# Altium PCB datalogger1.PcbDoc
Units mm, origin at the board's own origin, x right, y up, seen from the top; angles counter-clockwise.
Board outline 101.6 x 53.34 mm, 2 copper layers (Top Layer, Bottom Layer); 36 components, 62 nets, 209 pads, 15 vias.
Unrouted connection lines stored in the file: 7.
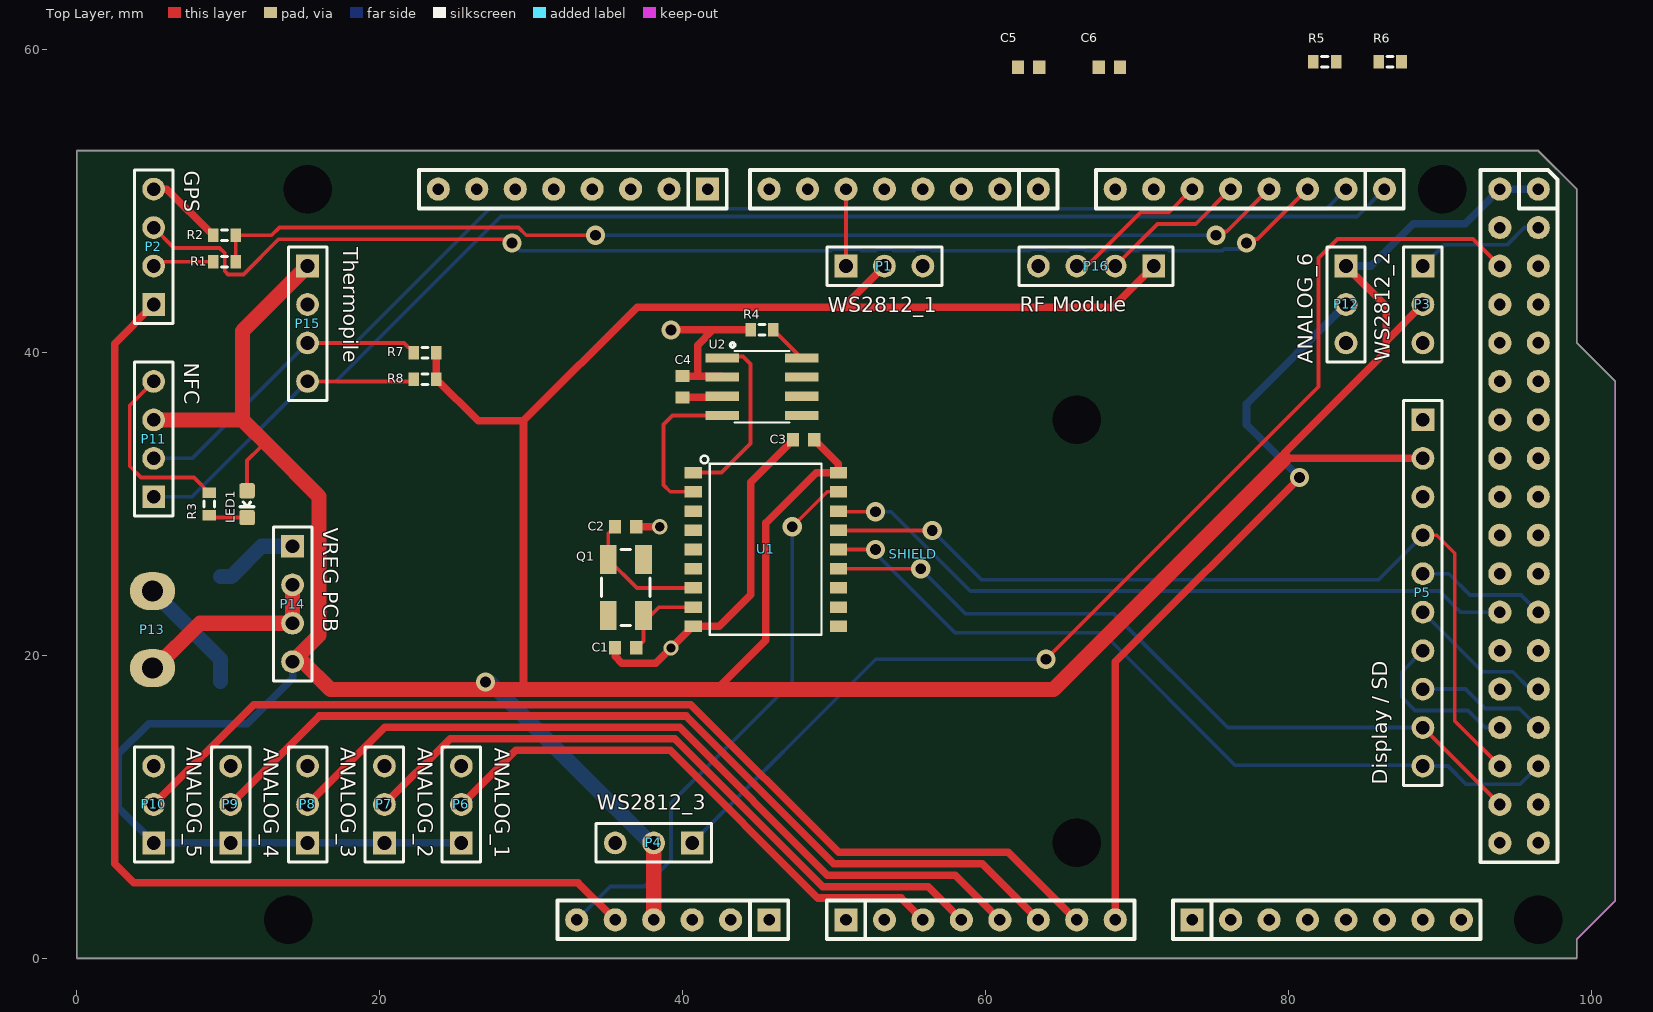
[diagram p0: Top Layer view]
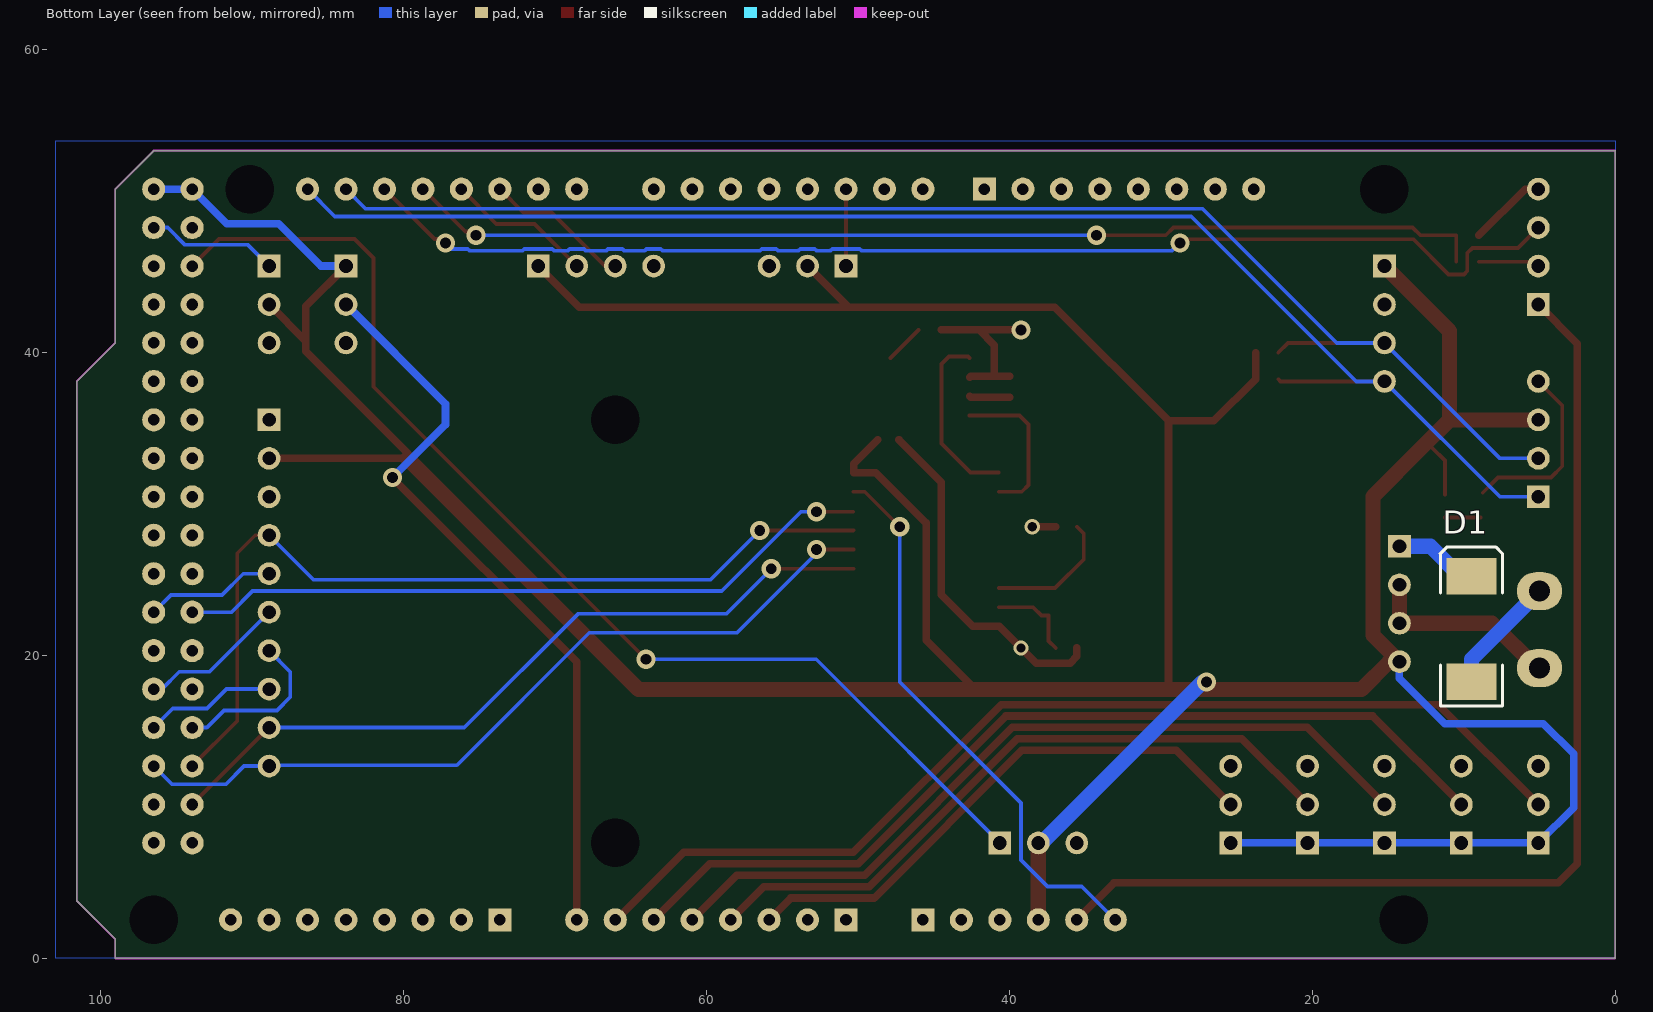
[diagram p1: Bottom Layer view, seen from below]

## Layer stack, top to bottom
Top Solder: solder mask 0.0102, Solder Resist, Dk 3.5
Top Layer: signal copper 0.0356
Dielectric1: dielectric 0.32, FR-4, Dk 4.8
Bottom Layer: signal copper 0.0356
Bottom Solder: solder mask 0.0102, Solder Resist, Dk 3.5

## Board outline
0,0 0,53.34 96.52,53.34 99.06,50.8 99.06,40.64 101.6,38.1 101.6,3.81 99.06,1.27 99.06,0

## Design rules (kind name [scope] priority, off if disabled: settings)
Clearance [All] p1: gap=0.254
FabricationTestPointUsage TestPointUsage [All] p1: valid=0 allowmultiple=FALSE
FabricationTestpoint Testpoint [All] p1: side=3 testpointundercomponent=TRUE minsize=1.016 maxsize=2.54 preferedsize=1.524 minholesize=0 maxholesize=1.016 preferedholesize=0.813 testpointgrid=0.025 allowsidetop=TRUE allowsidebottom=TRUE usegrid=TRUE gridtolerance=0
HoleSize [All] p1: absolutevalues=TRUE maxlimit=3.5 minlimit=0.025 maxpercent=80.000 minpercent=20.000
PlaneClearance [All] p1: clearance=0.5
PlaneConnect [All] p1: planeconnectstyle=Relief reliefexpansion=0.5 reliefentries=4 reliefconductorwidth=0.25 reliefairgap=0.25
PolygonConnect [All] p1: connectstyle=Relief reliefconductorwidth=0.254 reliefentries=4 polygonreliefangle="90 Angle" airgapwidth=0.254
RoutingVias [All] p1: holewidth=0.711 width=1.27 viastyle="Through Hole" minholewidth=0.711 minwidth=1.27 maxholewidth=0.711 maxwidth=1.27
SilkToSolderMaskClearance SilkscreenOverComponentPads [IsPad] p1: minsilkscreentomaskgap=0.254 clearancetoexposedcopper=TRUE
SolderMaskExpansion [All] p1: expansion=0.102
Width Width_1 [(InNet('3.3V') OR InNet('5V') OR InNet('GND') OR InNet('VCC'))] p1: maxlimit=2 minlimit=0.25 preferedwidth=0.5 minimp=50.000000 maximp=50.000000 favimp=50.000000
Width [All] p2: maxlimit=1 minlimit=0.25 preferedwidth=0.25 minimp=50.000000 maximp=50.000000 favimp=50.000000
24 further rules are at their usual default settings.

## Components (designator, comment, footprint, x,y, rotation, side; value= is the part's Value field where it differs from the comment)
C1 "Cap Ceramic" 1608[0603] 36.25,20.5 r180 top
C2 "Cap Ceramic" 1608[0603] 36.25,28.5 r0 top
C3 "Cap Ceramic" 1608[0603] 48,34.25 r0 top
C4 "Cap Ceramic" 1608[0603] 40,37.75 r270 top
C5 "Cap Ceramic" 1608[0603] 62.861,58.841 r0 top
C6 "Cap Ceramic" 1608[0603] 68.195,58.841 r0 top
D1 "Diode" SMC 9.5,21.75 r90 bottom
LED1 "Red" LED-0603 11.25,30 r180 top
P1 "WS2812_1" HDR1X3 50.8,45.72 r0 top
P2 "GPS" HDR1X4 5.08,43.18 r90 top
P3 "WS2812_2" HDR1X3 88.9,45.72 r270 top
P4 "WS2812_3" HDR1X3 40.64,7.62 r180 top
P5 "Display / SD" HDR1X10 88.9,35.56 r270 top
P6 "ANALOG_1" HDR1X3 25.4,7.62 r90 top
P7 "ANALOG_2" HDR1X3 20.32,7.62 r90 top
P8 "ANALOG_3" HDR1X3 15.24,7.62 r90 top
P9 "ANALOG_4" HDR1X3 10.16,7.62 r90 top
P10 "ANALOG_5" HDR1X3 5.08,7.62 r90 top
P11 "NFC" HDR1X4 5.08,30.48 r90 top
P12 "ANALOG_6" HDR1X3 83.82,45.72 r270 top
P13 "Power" "2P 5.08mm Screw Terminal" 5,24.25 r270 top
P14 "VREG PCB" HDR1X4 14.25,27.21 r270 top
P15 "Thermopile" HDR1X4 15.24,45.72 r270 top
P16 "RF Module" HDR1X4 71.12,45.72 r180 top
Q1 "16MHz" CRYSTAL-SMD-5X3 36.25,24.5 r270 top
R1 "Res3" J1-0603 9.75,46 r180 top
R2 "Res3" J1-0603 9.75,47.75 r0 top
R3 "Res3" J1-0603 8.75,30 r270 top
R4 "4.7K" J1-0603 45.25,41.5 r0 top
R5 "100R" J1-0603 82.419,59.222 r0 top
R6 "100R" J1-0603 86.737,59.222 r0 top
R7 "Res3" J1-0603 23,40 r0 top
R8 "Res3" J1-0603 23,38.25 r0 top
SHIELD "Arduino Mega2560 R3" "Arduino Mega Shield" 0,0 r0 top locked
U1 "MCP2515" SO-18W 45.5,27 r270 top
U2 "CAN transceiver" SO08 45.25,37.75 r270 top

## Footprints (in the part's own frame and the unit in brackets; to place one, negate y for a bottom-side part, rotate by r counter-clockwise, add the part's x,y. Pads: shape width x height; smd on the part's side, far side on the other; paste and mask are expansions set on the pad)
"2P 5.08mm Screw Terminal" [mm]
  oval 2.5x3 hole 1.4: 0(0,0) 1(5.08,0)
1608[0603] [mm] "Chip Capacitor, Body 1.6x0.8mm, IPC High Density"
  rect 0.8x0.9 smd: 1(-0.7,0) 2(0.7,0)
  body extent -0.87,-0.48 0.87,0.48, height 1.3
"Arduino Mega Shield" [mil]
  round 62.99 hole 125.98: 0(550,100) 0(600,2000) 0(2600,300) 0(2600,1400) 0(3550,2000) 0(3800,100)
  round 60 hole 30: 2(2300,2000) 3(2200,2000) 3V3(1400,100) 4(2100,2000) 5(2000,2000) 5V(1500,100) 5V(3700,2000) 5V(3800,2000) 6(1900,2000) 7(1800,2000) 9(1540,2000) 10(1440,2000) 11(1340,2000) 12(1240,2000) 13(1140,2000) 22(3700,1900) 23(3800,1900) 24(3700,1800) 25(3800,1800) 26(3700,1700) 27(3800,1700) 28(3700,1600) 29(3800,1600) 30(3700,1500) 31(3800,1500) 32(3700,1400) 33(3800,1400) 34(3700,1300) 35(3800,1300) 36(3700,1200) 37(3800,1200) 38(3700,1100) 39(3800,1100) 40(3700,1000) 41(3800,1000) 42(3700,900) 43(3800,900) 44(3700,800) 45(3800,800) 46(3700,700) 47(3800,700) 48(3700,600) 49(3800,600) 50(3700,500) 51(3800,500) 52(3700,400) 53(3800,400) A1(2100,100) A2(2200,100) A3(2300,100) A4(2400,100) A5(2500,100) A6(2600,100) A7(2700,100) A9(3000,100) A10(3100,100) A11(3200,100) A12(3300,100) A13(3400,100) A14(3500,100) A15(3600,100) AREF(940,2000) GND(1040,2000) GND(1600,100) GND(1700,100) GND(3700,300) GND(3800,300) RESET(1300,100) RX0(2500,2000) RX1(3200,2000) RX2(3000,2000) RX3(2800,2000) SCL(3400,2000) SDA(3300,2000) TX0(2400,2000) TX1(3100,2000) TX2(2900,2000) TX3(2700,2000)
  rect 60x60 hole 30: 8(1640,2000) A8(2900,100) AO(2000,100) VIN(1800,100)
  Keep-Out Layer lines w5: 3900,0 3900,50 ; 3900,0 0,0 0,2100 3800,2100 3900,2000 3900,1600 4000,1500 4000,150 3900,50 ; 3900,0 3900,50
  silkscreen extent 890,50 3850,2050, body extent 890,50 3850,2050, height 335
CRYSTAL-SMD-5X3 [mil]
  rect 75x44 smd: 1(-72.83,-45.28) 2(73,-45.28) 3(73,46) 4(-72.83,46)
  silkscreen extent -98,-63 99,63
HDR1X3 [mm] "Connector; Header; 3 Position"
  rect 1.5x1.5 hole 0.9: 1(0,0)
  round 1.5 hole 0.9: 2(2.54,0) 3(5.08,0)
  silkscreen extent -1.27,-1.27 6.35,1.27
HDR1X4 [mm] "Connector; Header; 4 Position"
  rect 1.5x1.5 hole 0.9: 1(0,0)
  round 1.5 hole 0.9: 2(2.54,0) 3(5.08,0) 4(7.62,0)
  silkscreen extent -1.27,-1.27 8.89,1.27
HDR1X10 [mm] "Connector; Header; 10 Position"
  rect 1.5x1.5 hole 0.9: 1(0,0)
  round 1.5 hole 0.9: 2(2.54,0) 3(5.08,0) 4(7.62,0) 5(10.16,0) 6(12.7,0) 7(15.24,0) 8(17.78,0) 9(20.32,0) 10(22.86,0)
  silkscreen extent -1.27,-1.27 24.13,1.27
J1-0603 [mm] "Chip Resistor, Body 1.6x0.8mm, IPC High Density"
  rect 0.7x0.9 smd: 1(-0.75,0) 2(0.75,0)
  silkscreen extent -0.2,-0.35 0.2,0.35, body extent -0.85,-0.48 0.85,0.48, height 0.9
LED-0603 [mil]
  rrect30% 40x40 smd: A(0,-34.53) C(0,35)
  silkscreen extent -18,-6 19,7
SMC [mm] "DO-214-AB/SMC; 2 C-Bend Leads; Body 7.9 x 5.9 mm, inc. leads (LxW)"
  rect 2.4x3.3 smd: 1(-3.475,0) 2(3.475,0)
  silkscreen extent -5.07,-2.05 5.43,2.05
SO08 [mil]
  rect 24x87 smd: 1(-75,-103) 2(-25,-103) 3(25,-103) 4(75,-103) 5(75,103) 6(25,103) 7(-25,103) 8(-75,103)
  silkscreen extent -114,-82 93,71
SO-18W [mil]
  rect 30x45 smd: 1(-200,-188.5) 2(-150,-188.5) 3(-100,-188.5) 4(-50,-188.5) 5(0,-188.5) 6(50,-188.5) 7(100,-188.5) 8(150,-188.5) 9(200,-188.5) 10(200,189) 11(150,189) 12(100,189) 13(50,189) 14(0,189) 15(-50,189) 16(-100,189) 17(-150,189) 18(-200,189)
  silkscreen extent -244,-169 222,145

## Part data
C1 C2 C3 C4 C5 C6: library part "Cap Semi", "Capacitor (Semiconductor SIM Model)"
D1: "Default Diode"
LED1: library part LED0603, "Power Indicator"
P1 P3 P4 P6 P7 P8 P9 P10 P12: library part "Header 3", "Header, 3-Pin"
P2 P11 P14 P15 P16: library part "Header 4", "Header, 4-Pin"
P5: library part "Header 10", "Header, 10-Pin"
P13: library part "2P Screw Terminal 5.08mm"
Q1: library part CRYSTAL5X3, "CrystalsVarious standard crystals. Proven footprints. Spark Fun Electronics SKU : COM-00534"
R1 R2 R3 R7 R8: "Resistor"
R4 R5 R6: library part Res3, "Resistor"
U1: library part MCP2510SO
U2: library part MCP2551

## Via types
v1: diameter 1.27, hole 0.711, Top Layer to Bottom Layer, 13 vias
v2: diameter 1, hole 0.6, Top Layer to Bottom Layer, 2 vias

## Nets (pads, with @x,y where several pads share a name; then routed paths per layer and width w, separated by ;. In a path a pad name is that pad's centre, name@x,y a point inside that pad or via, vN(x,y) a via of type N, cw(c..) or ccw(c..) an arc to the next point about the centre after c; other vN are vias at no path point)
3.3V: P2.1 SHIELD.3V3 | length 72.6
  Top Layer w0.5: P2.1 2.5,40.6 2.5,6.25 3.75,5 33.1,5 SHIELD.3V3
5V: C3.2 C4.2 LED1.A P1.2 P3.2 P4.2 P5.2 P6.1 P7.1 P8.1 P9.1 P10.1 P11.3 P12.1 P14.4 P15.1 P16.1 R7.2 R8.2 SHIELD.5V U1.18 U2.3 | length 319.7
  Top Layer w0.25: LED1.A@11.25,30.627 11.25,32.877 12.123,33.75 12.75,33.75
  Top Layer w0.5: R7.2 R8.2 26.5,35.5 29.5,35.5 ; 29.5,17.762 29.5,35.5 ; C4.2 42.569,37.05 U2.3 ; 42.25,17.762 45.5,21.012 45.5,28.75 48.83,32.08 U1.18 50.301,32.649 C3.2 ; P1.2 50.62,43 ; P16.1 68.4,43 50.62,43 ; P12.1 86.47,43.07 86.47,40.08 79.75,33.36 79.75,33 79.77,33.02 P5.2 ; 86.47,40.75 P3.2 ; 29.5,35.5 37,43 50.62,43
  Top Layer w1: P11.3 10.94,35.56 ; P15.1 10.94,41.42 10.94,35.56 ; SHIELD.5V@38.1,2.54 P4.2 ; 79.75,33 64.512,17.762 42.25,17.762 29.5,17.762 16.75,17.762 14.922,19.59 P14.4 16,21.34 16,30.5 12.75,33.75 10.94,35.56
  Bottom Layer w0.5: P14.4 14.25,18.5 11.25,15.5 4.75,15.5 2.75,13.5 2.75,9.95 P10.1 P9.1 P8.1 P7.1 P6.1 ; P12.1 85.47,45.72 88.25,48.5 91.68,48.5 93.98,50.8 SHIELD.5V@96.52,50.8
  Bottom Layer w1: v1(27,18.25) 27.25,18.25 P4.2@37.99,7.51
25: SHIELD.25
26: SHIELD.26
27: SHIELD.27
28: SHIELD.28
29: SHIELD.29
30: SHIELD.30
31: SHIELD.31
32: SHIELD.32
33: SHIELD.33
34: SHIELD.34
35: SHIELD.35
36: SHIELD.36
37: SHIELD.37
38: SHIELD.38
39: SHIELD.39
40: SHIELD.40
41: SHIELD.41
44: SHIELD.44
45: SHIELD.45
46: SHIELD.46
CAN_CS: SHIELD.42 U1.16 | length 46.4
  Top Layer w0.25: U1.16@50.341,29.5 v1(52.75,29.5)
  Bottom Layer w0.25: v1(52.75,29.5) 53.75,29.5 59,24.25 90,24.25 91.39,22.86 SHIELD.42
CAN_HIGH: R6.2 U2.7
CAN_INT: U1.12
CAN_LOW: R5.2 U2.6
CAN_RXD: U1.2 U2.4 | length 10.3
  Top Layer w0.254: U1.2 39.19,30.81 38.75,31.25 38.75,35.25 39.345,35.845 U2.4
CAN_TXD: U1.1 U2.1 | length 11.9
  Top Layer w0.254: U1.1 42.58,32.08 44.5,34 44.5,39.25 44,39.75 42.729,39.75 U2.1
GND: C1.2 C2.2 C3.1 C4.1 C5.1 C6.1 P1.3 P2.4 P3.3 P4.3 P5.1 P6.3 P7.3 P8.3 P9.3 P10.3 P11.4 P12.3 P13.1 P14.2 P14.3 P15.2 P16.4 R2.1 R3.1 R4.1 SHIELD.GND U1.9 U2.2 | length 66.3
  Top Layer w0.25: P11.4 3.5,36.52 3.5,32.5 4.25,31.75 7.75,31.75 R3.1
  Top Layer w0.5: P2.4 5.95,50.8 R2.1 ; C1.2 35.55,19.95 36,19.5 38.25,19.5 v2(39.25,20.5) 40.67,21.92 U1.9 42.42,21.92 44.5,24 44.5,31.45 C3.1 ; C2.2 v2(38.5,28.5) ; v1(39.25,41.5) 42,41.5 ; C4.1 41,38.45 ; U2.2 42.569,38.45 41,38.45 ; R4.1 42,41.5 ; 41,38.45 41,40.5 42,41.5
  Top Layer w1: P13.1 5.17,19.17 8.13,22.13 P14.3 P14.2
GPS_RX: R1.1 R2.2 SHIELD.TX1 | length 71.6
  Top Layer w0.254: R1.1 R2.2 12.87,47.75 13.386,48.266 29.171,48.266 29.687,47.75 v1(34.25,47.75) ; v1@75.242,48.008 75.948,48.008 SHIELD.TX1
  Bottom Layer w0.254: v1(34.25,47.75) v1(75.242,47.75)
GPS_TX: P2.3 SHIELD.RX1 | length 81.7
  Top Layer w0.254: P2.3 6.421,46.919 9.42,46.919 9.769,46.57 9.769,45.392 9.992,45.169 11.008,45.169 13.331,47.492 28.508,47.492 v1(28.75,47.25) ; v1@77.25,47.5 77.98,47.5 SHIELD.RX1
  Bottom Layer w0.254: v1(28.75,47.25) 29.266,46.734 49.775,46.734 49.892,46.851 51.708,46.851 51.825,46.734 52.755,46.734 52.872,46.851 53.808,46.851 53.925,46.734 55.295,46.734 55.412,46.851 56.348,46.851 56.465,46.734 62.915,46.734 63.032,46.851 63.968,46.851 64.085,46.734 65.455,46.734 65.572,46.851 66.508,46.851 66.625,46.734 67.995,46.734 68.112,46.851 69.048,46.851 69.165,46.734 70.095,46.734 70.212,46.851 72.028,46.851 72.145,46.734 75.663,46.734 75.78,46.851 76.851,46.851 v1(77.25,47.25)
MISO: P5.4 SHIELD.50 U1.15 | length 59
  Top Layer w0.25: U1.15 50.321,28.25 v1(56.5,28.25) ; P5.4 89.81,27.94 91,26.75 91,15.68 SHIELD.50
  Bottom Layer w0.25: v1(56.5,28.25) 59.75,25 85.96,25 P5.4
MOSI: P5.10 SHIELD.51 U1.14 | length 53.3
  Top Layer w0.25: U1.14 v1(52.75,27)
  Bottom Layer w0.25: v1(52.75,27) 52.75,26.75 58,21.5 67.75,21.5 76.5,12.75 P5.10@88.9,12.75 ; P5.10 90.55,12.7 91.75,11.5 95.32,11.5 SHIELD.51
NetC1_1: C1.1 Q1.3 U1.8 | length 5.9
  Top Layer w0.254: C1.1 37.418,20.968 Q1.3 37.896,22.646 38.44,23.19 U1.8
NetC2_1: C2.1 Q1.1 U1.7 | length 8.7
  Top Layer w0.254: C2.1 35.1,28.05 Q1.1 36.99,24.46 U1.7
NetC5_2: C5.2 R5.1
NetC6_2: C6.2 R6.1
NetD1_1: D1.1 P13.0 | length 7.8
  Bottom Layer w1: P13.0 9.5,19.75 D1.1
NetLED1_C: LED1.C R3.2 | length 2.4
  Top Layer w0.25: R3.2@8.889,29.111 LED1.C
NetP2_2: P2.2 R1.2 | length 4
  Top Layer w0.254: P2.2 5.36,46 R1.2
NetR4_2: R4.2 U2.8 | length 2.6
  Top Layer w0.254: R4.2 46.021,41.5 U2.8
OLED_CS: P5.6 SHIELD.47 | length 9.7
  Bottom Layer w0.25: P5.6 92.839,18.921 94.829,18.921 95.97,17.78 SHIELD.47
OLED_DC: P5.8 SHIELD.49 | length 8.7
  Bottom Layer w0.25: P5.8 91.72,17.78 93,16.5 95.26,16.5 SHIELD.49
OLED_RESET: P5.7 SHIELD.48 | length 11
  Bottom Layer w0.25: P5.7 87.5,18.92 87.5,17.25 88.381,16.369 91.881,16.369 93.01,15.24 SHIELD.48
POT_1: P6.2 SHIELD.A2 | length 36.6
  Top Layer w0.5: P6.2 25.418,10.16 29,13.742 39.192,13.742 48.95,3.984 54.436,3.984 SHIELD.A2
POT_2: P7.2 SHIELD.A3 | length 44.8
  Top Layer w0.5: P7.2 24.656,14.496 39.504,14.496 49.262,4.738 56.222,4.738 SHIELD.A3
POT_3: P8.2 SHIELD.A4 | length 53.1
  Top Layer w0.5: P8.2 20.33,15.25 39.816,15.25 49.574,5.492 58.008,5.492 SHIELD.A4
POT_4: P9.2 SHIELD.A5 | length 61.3
  Top Layer w0.5: P9.2 16.004,16.004 40.246,16.004 50.004,6.246 59.794,6.246 SHIELD.A5
POT_5: P10.2 SHIELD.A6 | length 69.6
  Top Layer w0.5: P10.2 11.678,16.758 40.558,16.758 50.316,7 61.5,7 SHIELD.A6@66,2.5
POT_6: P12.2 SHIELD.A7 | length 49.9
  Top Layer w0.5: SHIELD.A7 68.58,19.58 v1(80.75,31.75)
  Bottom Layer w0.5: v1(80.75,31.75) 77.25,35.25 77.25,36.61 P12.2
RF_RX: P16.3 SHIELD.TX2 | length 9.7
  Top Layer w0.254: P16.3 66.72,45.72 70.25,49.25 72.11,49.25 SHIELD.TX2
RF_TX: P16.2 SHIELD.RX2 | length 9.7
  Top Layer w0.254: P16.2 71.36,48.5 73.9,48.5 SHIELD.RX2
RS: SHIELD.RESET U1.17 | length 37.2
  Top Layer w0.25: v1(47.25,28.5) 49.56,30.81 U1.17
  Bottom Layer w0.25: SHIELD.RESET 35.23,4.75 37.5,4.75 39.25,6.5 39.25,10.25 47.25,18.25 v1(47.25,28.5)
SCK: P5.9 SHIELD.52 U1.13 | length 50.1
  Top Layer w0.25: U1.13 v1(55.73,25.73) ; P5.9 SHIELD.52
  Bottom Layer w0.25: v1(55.73,25.73) 58.71,22.75 ; 58.75,22.75 68.5,22.75 76.01,15.24 P5.9
SCL: P11.1 P15.4 R8.1 SHIELD.SCL | length 96.8
  Top Layer w0.25: P15.4 22.1,38.1 R8.1
  Bottom Layer w0.25: P11.1 7.62,30.48 P15.4 17.1,38.1 28,49 84.56,49 SHIELD.SCL
SD_CS: P5.5 SHIELD.43 | length 8.7
  Bottom Layer w0.25: P5.5 90.6,25.4 91.999,24.001 94.453,24.001 94.454,24 95.38,24 SHIELD.43
SDA: P11.2 P15.3 R7.1 SHIELD.SDA | length 93.4
  Top Layer w0.25: P15.3 21.61,40.64 R7.1
  Bottom Layer w0.25: P11.2 7.62,33.02 P15.3 18.39,40.64 27.254,49.504 82.524,49.504 SHIELD.SDA
SS: SHIELD.53
VCC: D1.2 P14.1 | length 5.6
  Bottom Layer w1: D1.2 10.225,25.225 12.21,27.21 P14.1
WS2812_1: P1.1 SHIELD.5 | length 5.4
  Top Layer w0.25: SHIELD.5 P1.1 P1.1@51.02,45.5
WS2812_2: P3.1 SHIELD.23 | length 8.7
  Bottom Layer w0.25: P3.1 90.299,47.119 94.453,47.119 95.594,48.26 SHIELD.23
WS2812_3: P4.1 SHIELD.24 | length 75.6
  Top Layer w0.25: v1(64,19.75) 82,37.75 82,46.25 83.25,47.5 92.2,47.5 SHIELD.24
  Bottom Layer w0.25: P4.1 52.77,19.75 v1(64,19.75)
pads on no net: P5.3 Q1.2 Q1.4 SHIELD.0 SHIELD.2 SHIELD.3 SHIELD.4 SHIELD.6 SHIELD.7 SHIELD.8 SHIELD.9 SHIELD.10 SHIELD.11 SHIELD.12 SHIELD.13 SHIELD.22 SHIELD.A1 SHIELD.A8 SHIELD.A9 SHIELD.A10 SHIELD.A11 SHIELD.A12 SHIELD.A13 SHIELD.A14 SHIELD.A15 SHIELD.AO SHIELD.AREF SHIELD.RX0 SHIELD.RX3 SHIELD.TX0 SHIELD.TX3 SHIELD.VIN U1.3 U1.4 U1.5 U1.6 U1.10 U1.11 U2.5

## Polygon pours and split planes (outlines as drawn)
GND on Bottom Layer "GND" (solid, remove dead copper, shelved, pour order 0): 0,54 0,0 103,0 103,54

## Silkscreen, mask and mechanical layers (free items; w line width, h text height)
Mechanical 4:
  lines w0.254: 12.75,18.28 33.07,18.28 33.07,36.06 12.75,36.06 12.75,18.28
Mechanical 16:
  drawing of 1873 lines, arcs and shapes, not listed
  text "1" at -53.754,109.611 h1
  text "2" at 18.89,109.611 h1
  text "3" at 92.042,109.611 h1
  text "4" at 164.94,109.611 h1
  text "A" at -88.095,86.599 h1
  text "B" at -88.095,38.542 h1
  text "C" at -88.095,-9.972 h1
  text "C" at 198.925,-9.972 h1
  text "ENGINEER:" at 83.99,-46.98 h1
  text "TITLE:" at 122.09,-46.98 h1
  text "PCB DESIGNER:" at 83.99,-54.473 h1
  text "D" at -88.095,-57.978 h1
  text "D" at 198.925,-57.978 h1
  text "DATE:" at 83.99,-62.22 h1
  text "PART NO.:" at 122.09,-62.22 h1
  text "REV:" at 175.43,-62.22 h1
  text "Altium Limited" at 50.97,-64.76 h1
  text ".PRINT_DATE" at 85.26,-65.268 h1
  text "12a Rodborough Rd" at 50.97,-67.3 h1
  text "Frenchs Forest" at 50.97,-69.84 h1
  text "FILE NAME:" at 83.99,-69.84 h1
  text "DWG NO:" at 122.09,-69.84 h1
  text "SCALE:" at 175.43,-69.84 h1
  text "NSW 2086" at 50.97,-72.38 h1
  text ".PCB_FILE_NAME_NO_PATH" at 85.26,-72.888 h1
  text "1" at -53.754,-78.349 h1
  text "2" at 18.89,-78.349 h1
  text "3" at 92.042,-78.349 h1
  text "4" at 164.94,-78.349 h1